# Altium PCB GPSDO_V1.0.PcbDoc (part 2 of 2)
Units mil, origin at the board's own origin, x right, y up, seen from the top; angles counter-clockwise.
Board outline 3740.16 x 3740.16 mil, 2 copper layers (Top Layer, Bottom Layer); 86 components, 49 nets, 384 pads, 118 vias.
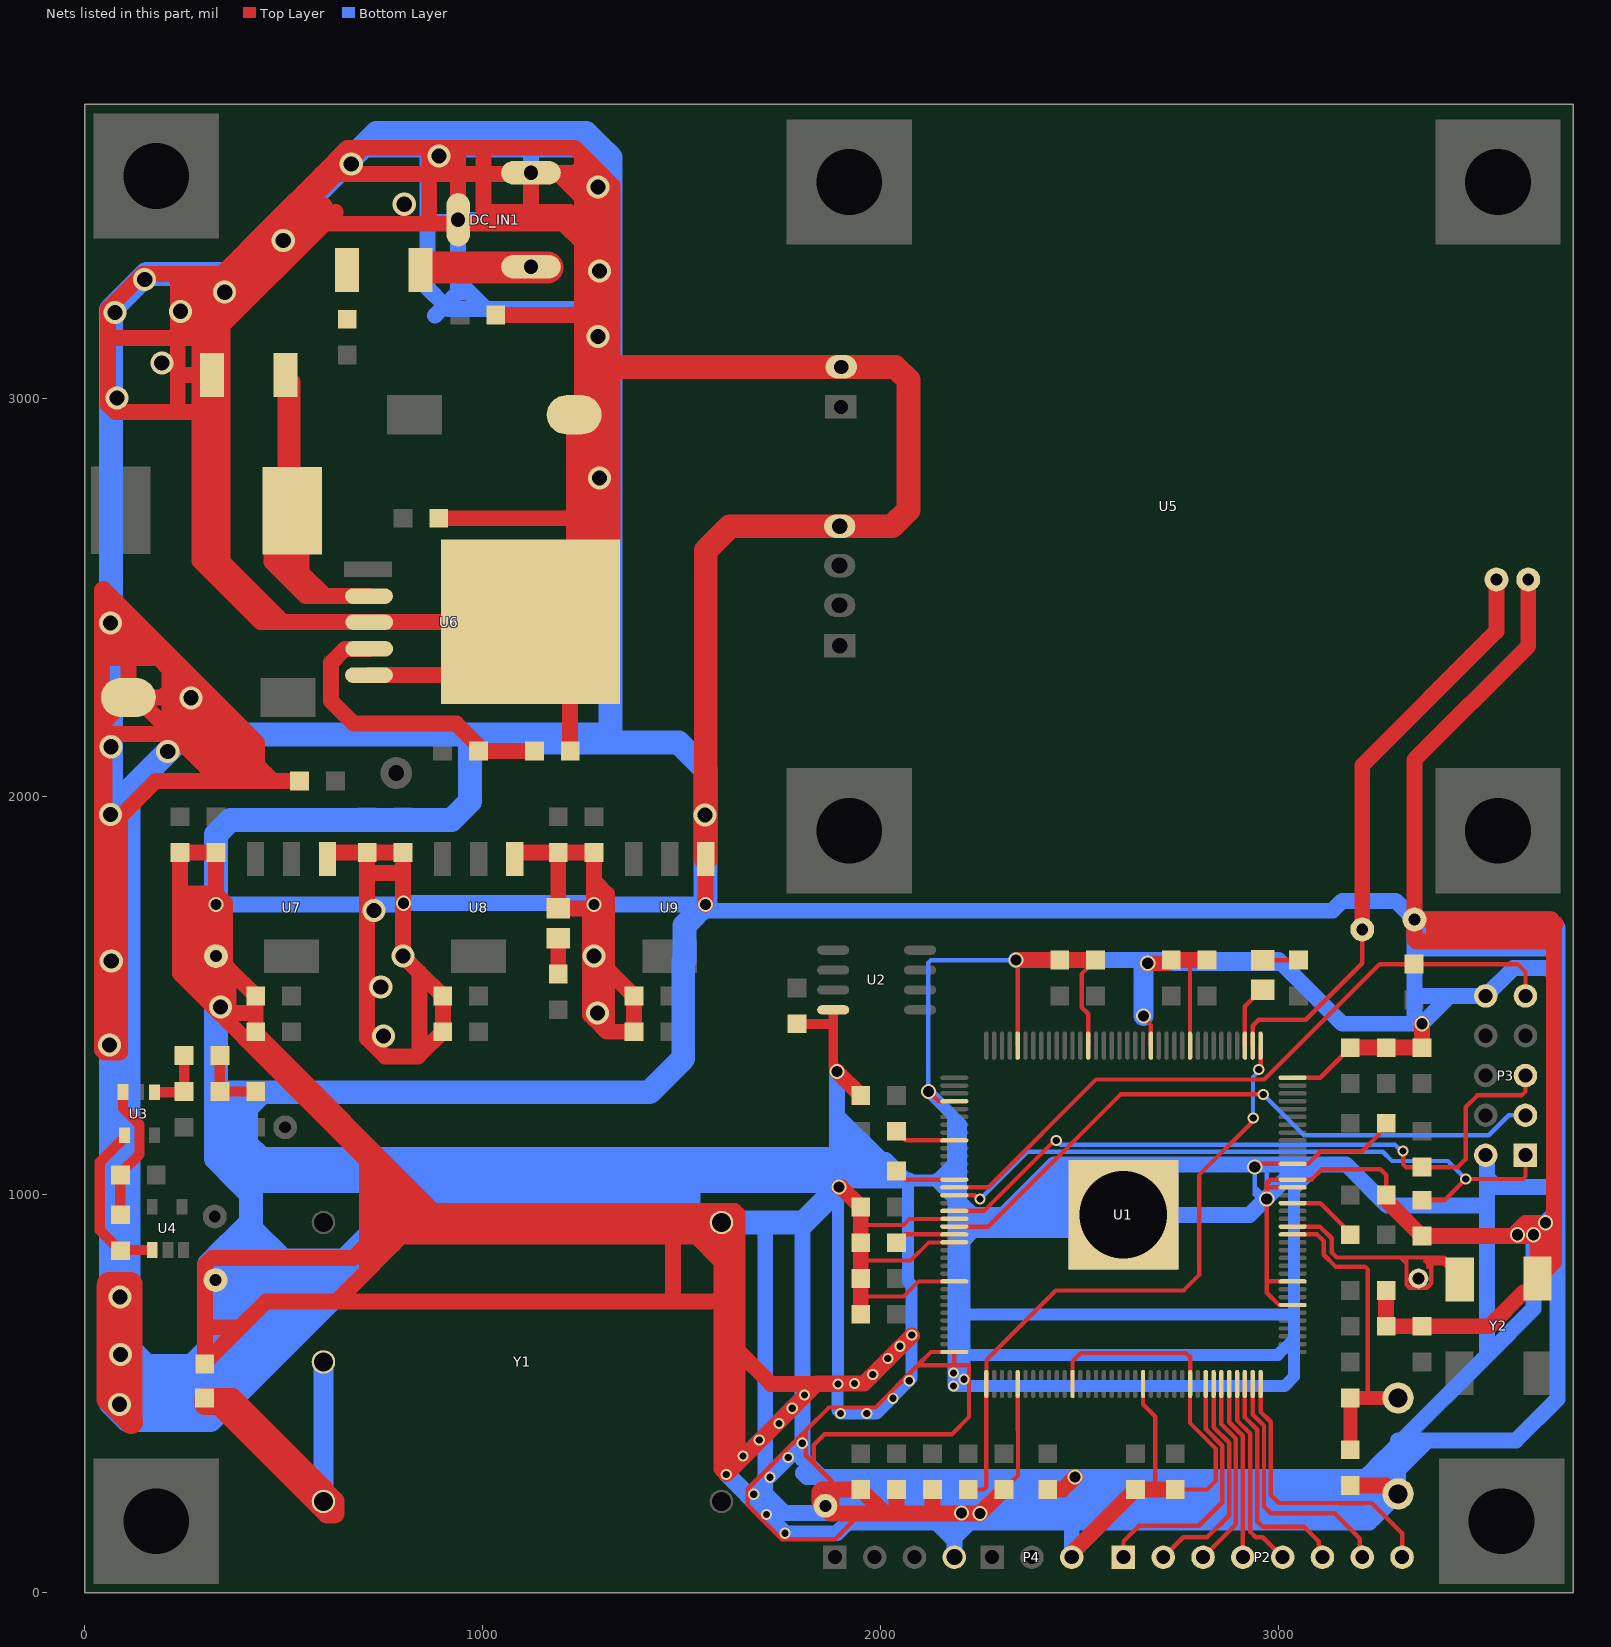
[diagram p2: the nets of this part, all layers, seen from the top]

## Via types
v1: diameter 28, hole 18, Top Layer to Bottom Layer, 41 vias
v2: diameter 58, hole 38, Top Layer to Bottom Layer, 38 vias
v3: diameter 38, hole 28, Top Layer to Bottom Layer, 38 vias
v4: diameter 38, hole 18, Top Layer to Bottom Layer, 1 vias

## Nets (pads, with @x,y where several pads share a name; then routed paths per layer and width w, separated by ;. In a path a pad name is that pad's centre, name@x,y a point inside that pad or via, vN(x,y) a via of type N, cw(c..) or ccw(c..) an arc to the next point about the centre after c; other vN are vias at no path point) (continued)
GND: C1.2 C2.1 C3.1 C4.1 C5.1 C6.1 C7.1 C8.1 C9.1 C10.1 C13.1 C14.1 C15.1 C16.1 C17.1 C18.1 C19.1 C20.1 C21.1 C22.1 C23.1 C24.1 C25.1 C26.1 C27.1 C28.1 C30.1 C31.2 C32.1 C33.2 C34.1 C37.1 C38.1 C39.1 C40.1 C41.1 C42.1 C43.1 C44.1 C45.1 C46.1 C47.1 C48.1 D2.1 DC_IN1.2 DC_IN1.3 LED3.2 P3.2 P3.10 P4.3 pad.0@329,786 pad.1 pad.2@330,1600 pad.2@1861,219 pad.2@2610,950 pad.2@3341,1692 pad.2@3627,2546 R4.2 R6.2 R16.2 S1.1 U1.4 U1.19 U1.22 U1.27 U1.36 U1.41 U1.48 U1.57 U1.63 U1.79 U1.82 U1.94 U1.95 U1.97 U1.108 U1.118 U1.123 U1.131 U1.140 U1.145 U2.4 U5.1 U5.3 U6.3 U6.5 U7.1 U8.1 U9.1 Y1.5 Y2.2 | length 115477.6
  Top Layer w10: 1950,745 2057.8,745 2095.47,782.67 U1.27@2185,782.67 ; 1950,835 2075,835 2121.09,881.09 U1.22@2185,881.09 ; 1950,925 2057.8,925 2072.95,940.15 U1.19@2185,940.15
  Top Layer w11: 1876,260 1876,282 1832,326 ; 1950,200 1885,135 1752,135 1666,221 1666,262 1812,408 ; v3(2120,1260) 2121.05,1260 2145.63,1235.42 U1.4@2185,1235.42 ; C15.1@2310,260 2345.12,295.12 2345.12,407.91 2344.25,408.78 U1.41@2344.25,525 ; U1.140@2344.25,1375 v3@2344.25,1590 ; U1.48@2482.05,525 2482.05,582.05 2503,603 2767,603 2777.72,592.28 2777.72,555.33 2777.32,554.93 U1.63@2777.32,525 2777.32,427.23 2841.5,363.05 2841.5,281.5 2820,260 C24.1@2740,260 ; U1.131@2521.42,1375 2521.42,1455.08 2504.88,1471.61 2504.88,1554.88 C20.1@2540,1590 ; U1.57@2659.21,525 2659.21,473.92 2690,443.13 2690,260 ; v3(2660,1450) 2660,1445.83 2678.9,1426.93 U1.123@2678.9,1375 ; C19.1@2722.07,1582.07 C19.1@2730,1590 ; 2775,1590 2777.32,1587.68 U1.118@2777.32,1375 ; v3(2940,1070) 2947.31,1070 2955.26,1077.95 U1.97@3035,1077.95 3073.92,1077.96 3105.96,1110 3210,1110 3251.88,1151.88 3251.88,1161.88 C26.1@3270,1180 ; U1.79@3035,723.62 3000.7,723.63 2970,754.33 2970,780 ; U1.82@3035,782.68 2972.68,782.68 2970,780 ; U1.94@3035,1018.9 2971.1,1018.9 2970,1020 ; U1.108@3035,1294.49 3104.49,1294.49 C6.1@3180,1370 ; C18.1@3270,1000 3270,1050 3255.54,1064.46 3108.5,1064.46 3082.63,1038.59 U1.95@3035,1038.58 2978.58,1038.58 2970,1030 2970,1020 ; 1812,408 1812,346 1832,326 ; 1812,408 1870,466 1987,466 2093,572 ; 1832,326 1832,372 1859,399 2179,399 2222,442 2222,572 2183,572 ; 2093,572 2183,572 ; 2093,572 2126.51,605.51 U1.36@2185,605.51 2185,574 2183,572 ; 2970,780 v3(2970,990) 2970,1020
  Top Layer w25: C3.1@1790,1430 1880.85,1430 ; U2.4@1880.85,1465 1880.85,1430 ; v3(1890,1310) 1890,1313.52 1880.85,1322.67 1880.85,1430
  Top Layer w40: C33.2@80,2276.99 106.99,2250 C33.2@110,2250 ; 89,1358 v2@50,1358 ; 89,1360 89,1950 179,2040 339.69,2040 ; C1.2@302,575 302,673 ; C1.2@308,584 391.5,667.5 ; v2@330,3261 330,3213 ; C32.1@540,2040 474,2040 ; 603,3486 557,3440 ; U7.1@610.55,1844.09 610.55,1858.35 612.2,1860 C41.1@710,1860 ; 631,3469 631,3468 603,3440 ; U6.5@714.51,2305.98 985.98,2305.98 U6.3@1118.98,2438.98 ; C34.1@890,2700 1230,2700 ; DC_IN1.3@938.5,3449.99 938.5,3564.5 ; C30.1@1033,3211 1250,3211 ; U8.1@1080.55,1864.76 1080.55,1861.65 1082.2,1860 C45.1@1190,1860 ; R16.2@1220,2115 1220,2340 U6.3@1121.02,2438.98 ; v3(1560,1730) 1560,1843.54 U9.1@1560.55,1844.09 ; v3(1890,1310) C21.1@1950,1250 ; v1(1893,525) 1839,525 ; v3(1895,1020) 1900,1020 C13.1@1950,970 1950,925 R6.2@1950,880 1950,835 C14.1@1950,790 1950,745 C22.1@1950,700 ; U5.3@1897.02,2680 U5.3@1900.67,2683.65 ; C8.1@2040,260 2040,200 ; v1@2079,647 1958,526 v1(1934,526) 1840,526 1839,525 ; C9.1@2130,260 2130,200 ; v3(2203.38,200.53) v3@2202.85,200 ; C15.1@2310,260 v3(2250,200) v3@2202.85,200 ; v3@2344.25,1590 C28.1@2450,1590 C20.1@2540,1590 ; C23.1@2420,260 2456.87,260 v3(2488.43,291.57) ; P4.3@2480,90 2483.65,93.65 2483.65,103.65 C16.1@2640,260 2690,260 C24.1@2740,260 ; v3(2671.09,1582.07) C19.1@2722.07,1582.07 ; C19.1@2730,1590 2775,1590 C27.1@2820,1590 ; C10.1@3180,270 3268.52,270 3289.52,249 S1.1@3300,249 ; C6.1@3180,1370 C5.1@3270,1370 C4.1@3360,1370 v3(3360,1430) ; C17.1@3270,760 C25.1@3270,670 C2.1@3360,670 3530,670 3614.88,754.88 3634.57,754.88 3650,770.32 Y2.2@3650,790 ; C18.1@3270,1000 3273.62,996.38 3273.62,983 R4.2@3360,896.62 v3@3587,896.62 ; 3411,1669 3421,1679 3692,1679 ; v3@3626.57,896.62 v3@3587,896.62 ; pad.2@3627,2546 3627,2379 3341,2093 pad.2@3341,1692 ; 3650,873.19 Y2.2@3650,790 ; 44,2158 44,1364 v2@50,1358 ; 44,2158 44,2184 ; 44,2158 50,2158 ; 44,2184 44,2349 ; 44,2184 50,2178 50,2158 ; 44,2184 C33.2@110,2250 ; 44,2349 110,2349 ; 44,2349 44,2385 ; 44,2385 106,2385 ; 44,2385 v2@44,2421 ; v2@44,2421 44,2490 ; v2@44,2421 102,2421 107.5,2426.5 ; 44,2490 107.5,2426.5 ; 44,2490 44,2520 47,2523 433,2137 433,2081 ; v2@50,1358 50,2158 ; 50,2158 193,2158 207.34,2172.34 ; 59,3148 59,3227 145.64,3313.64 234,3313.64 ; 59,3148 59,2985 77,2967 230,2967 ; 59,3148 64,3153 234,3153 ; 106,2385 141,2385 145,2389 ; 106,2385 110,2381 110,2349 ; 107.5,2426.5 145,2389 ; C33.2@110,2250 110,2349 ; C33.2@110,2250 C33.2@129.69,2250 ; 110,2349 185,2349 ; C33.2@129.69,2250 196,2250 213,2267 ; C33.2@129.69,2250 207.34,2172.34 ; 145,2389 185,2349 ; 185,2349 186,2349 213,2322 213,2321 ; 185,2349 213,2321 ; 207.34,2172.34 339.69,2040 ; 207.34,2172.34 213,2178 ; 213,2178 339.69,2051.31 339.69,2040 ; 213,2178 213,2222 ; 213,2222 213,2267 ; 213,2222 223,2222 405,2040 ; 213,2267 213,2321 ; 213,2267 221,2267 405,2083 ; 213,2321 405,2129 405,2083 ; 230,2967 288,2967 ; 230,2967 234,2971 234,3055 ; 234,3055 234,3153 ; 234,3055 239,3060 288,3060 ; 234,3153 260,3153 ; 234,3153 234,3313.64 ; 234,3313.64 252,3313.64 ; 240,1758 272,1758 ; 240,1758 C37.1@240,1860 C38.1@330,1860 330,1756 ; 240,1758 240,1556 v2@330,1466 ; 252,3313.64 252,3161 260,3153 ; 252,3313.64 342.64,3313.64 ; 252,3313.64 288,3277.64 288,3259 ; 260,3153 288,3153 ; 272,1758 306,1758 ; 272,1758 272,1553 v2@330,1495 ; 288,2593 288,2967 ; 288,2593 317.98,2593 ; 288,2593 442.02,2438.98 472,2438.98 ; 288,2967 288,3060 ; 288,2967 307,2967 320,2954 ; 288,3060 288,3153 ; 288,3060 D2.1@312,3060 ; 288,3153 288,3259 ; 288,3153 312,3153 ; 288,3259 312,3283 ; 302,673 302,824 320,842 676,842 710,876 ; 302,673 307.5,667.5 391.5,667.5 ; 306,1758 306,1552 330,1528 ; 306,1758 328,1758 330,1756 ; D2.1@312,3060 312,3153 ; D2.1@312,3060 312,3053 D2.1@319.41,3060 ; D2.1@312,3060 D2.1@319.41,3060 ; 312,3153 312,3244 ; 312,3153 330,3153 ; 312,3244 344.1,3275.94 382,3313.64 ; 312,3244 312,3283 ; 312,3283 342.64,3313.64 ; 317.98,2593 345,2593 ; 317.98,2593 472,2438.98 ; D2.1@319.41,3060 319.72,3060.29 330,3070 330,3153 ; D2.1@319.41,3060 D2.1@320,3060 320,2954 ; 320,2954 320,2618 345,2593 ; v2@330,1466 v2@330,1495 ; v2@330,1466 361.5,1434.5 ; v2@330,1495 330,1528 ; 330,1528 pad.2@330,1600 ; pad.2@330,1600 353,1577 ; pad.2@330,1600 v3(330,1730) 330,1756 ; 330,1756 353,1733 353,1577 ; 330,3153 330,3167 ; 330,3167 346,3183 ; 330,3167 330,3213 ; 330,3213 346,3229 ; 339.69,2040 405,2040 ; 342.64,3313.64 469,3440 ; 342.64,3313.64 382,3313.64 ; 345,2593 346,2592 ; 346,2592 346,3183 ; 346,2592 499.02,2438.98 ; 346,3183 603,3440 ; 346,3183 346,3229 ; 346,3229 557,3440 ; 353,1577 361.5,1568.5 ; 361.5,1434.5 433.62,1362.38 ; 361.5,1434.5 v2@361.5,1470 ; v2@361.5,1470 361.5,1568.5 ; v2@361.5,1470 374.5,1457 430,1457 ; 361.5,1568.5 C40.1@430,1500 430,1457 ; 382,3313.64 482.97,3414.11 509,3440 ; 391.5,667.5 455.81,731.81 631.81,731.81 ; 405,2040 405,2083 ; 405,2040 433,2040 ; C39.1@430,1410 430,1457 ; C39.1@430,1410 430,1407 C39.1@433.62,1403.38 ; C39.1@430,1410 433.62,1406.38 C39.1@433.62,1403.38 ; 433,2040 474,2040 ; 433,2040 433,2081 ; 433,2081 474,2040 ; 433.62,1362.38 C39.1@433.62,1403.38 ; 433.62,1362.38 710,1086 ; C39.1@433.62,1403.38 877.5,959.5 ; 469,3440 509,3440 ; 469,3440 594,3565 ; 472,2438.98 499.02,2438.98 ; 499.02,2438.98 U6.3@715.01,2438.98 U6.3@1118.98,2438.98 ; 509,3440 557,3440 ; 509,3440 634,3565 ; 557,3440 603,3440 ; 594,3565 634,3565 ; 594,3565 660,3631 700,3631 ; 603,3440 864,3440 ; 631.81,731.81 1480,731.81 ; 631.81,731.81 710,810 ; 634,3565 866,3565 ; 634,3565 700,3631 ; 700,3631 866,3631 ; 710,810 746.5,846.5 ; 710,810 710,876 ; 710,876 710,940 ; 710,940 710,1086 ; 710,940 719.21,930.79 739.5,930.79 ; 710,1086 739.5,1056.5 ; 710,1809 C41.1@710,1860 ; 710,1809 710,1393 755,1348 838,1348 841.5,1351.5 ; 710,1809 799,1809 800,1810 ; C41.1@710,1860 C42.1@800,1860 800,1810 ; 739.5,930.79 772,930.79 ; 739.5,930.79 739.5,1056.5 ; 739.5,930.79 739.5,853.5 746.5,846.5 ; 739.5,1056.5 772,1024 ; 746.5,846.5 774.5,874.5 ; 772,877 777,877 ; 772,877 772,930.79 ; 772,877 774.5,874.5 ; 772,930.79 772,991 ; 772,930.79 830.79,930.79 ; 772,991 772,1024 ; 772,991 830.79,932.21 830.79,930.79 ; 772,1024 865.21,930.79 ; 774.5,874.5 777,877 ; 777,877 796,896 ; 796,896 1478,896 ; 796,896 830.79,930.79 ; 800,1810 v2(800,1600) 841.5,1558.5 ; 830.79,930.79 865.21,930.79 ; 841.5,1351.5 C43.1@900,1410 C44.1@900,1500 841.5,1558.5 ; 841.5,1351.5 841.5,1558.5 ; 864,3440 1008,3440 ; 864,3440 866,3442 866,3565 ; 865.21,930.79 906.21,930.79 ; 866,3565 v2@866,3596 ; 866,3565 938,3565 ; v2@866,3596 866,3631 ; v2@866,3596 938.5,3596 ; 866,3631 941,3631 ; 877.5,959.5 1632.5,959.5 1640,952 1640,909 ; 877.5,959.5 906.21,930.79 ; 906.21,930.79 1478,930.79 ; 938,3565 938.5,3565 ; 938,3565 938.5,3564.5 ; 938.5,3564.5 938.5,3565 ; 938.5,3565 1002,3565 ; 938.5,3565 938.5,3596 ; 938.5,3596 938.5,3628.5 941,3631 ; 941,3631 1002,3631 ; 1002,3469 1120,3469 ; 1002,3469 1002,3565 ; 1002,3469 1002,3446 1008,3440 ; 1002,3565 DC_IN1.2@1121.54,3565 ; 1002,3565 1002,3631 ; 1002,3631 1231,3631 1250,3612 ; 1008,3440 1203,3440 ; U6.3@1118.98,2438.98 U6.3@1121.02,2438.98 ; U6.3@1120,2440 U6.3@1230,2550 ; U6.3@1120,2440 U6.3@1121.02,2438.98 ; U6.3@1120,2440 1138.31,2440 1139.33,2438.98 U6.3@1121.02,2438.98 ; 1120,3469 1218,3469 1247,3440 ; 1120,3469 1121.54,3470.54 DC_IN1.2@1121.54,3565 ; DC_IN1.2@1121.54,3565 1190,3565 1250,3505 ; DC_IN1.2@1121.54,3565 DC_IN1.2@1121.54,3568.09 1234.09,3568.09 1250,3584 ; C45.1@1190,1860 C46.1@1280,1860 1280,1788 ; C45.1@1190,1860 LED3.2@1190,1720 v3@1270,1720 ; 1203,3440 1247,3440 ; 1203,3440 1250,3393 ; U6.3@1230,2550 U6.3@1250,2570 ; U6.3@1230,2550 1230,2700 ; 1230,2700 C31.2@1230,2960 C31.2@1250,2980 ; 1247,3440 1250,3437 ; U6.3@1250,2570 C31.2@1250,2980 ; U6.3@1250,2570 U6.3@1289,2609 ; C31.2@1250,2980 1250,3090 ; 1250,3090 1250,3211 ; 1250,3090 1259.61,3080.39 1289,3080.39 ; 1250,3211 1250,3393 ; 1250,3393 1250,3437 ; 1250,3437 1250,3505 ; 1250,3505 1250,3584 ; 1250,3584 1250,3612 ; 1250,3612 1289,3573 ; v3@1270,1720 1270,1452 v2@1280,1442 ; v3@1270,1720 v3(1280,1730) ; v2@1280,1442 1312,1410 ; v2@1280,1442 v2(1280,1600) ; v2(1280,1600) 1312,1568 ; v2(1280,1600) v3(1280,1730) ; v3(1280,1730) 1280,1788 ; 1280,1788 1312,1756 1312,1568 ; U6.3@1289,2609 1289,3080.39 ; U6.3@1289,2609 1326,2646 1326,3080.39 ; 1289,3080.39 1289,3573 ; 1289,3080.39 1326,3080.39 ; 1289,3573 1326,3536 1326,3080.39 ; 1312,1410 1312,1568 ; 1312,1410 C47.1@1380,1410 C48.1@1380,1500 1312,1568 ; 1478,896 1536,896 ; 1478,896 1478,930.79 ; 1478,896 1478,733.81 1480,731.81 ; 1478,930.79 Y1.5@1600,930.79 1600,896 ; 1480,731.81 1600,731.81 ; 1536,896 1600,896 ; 1536,896 1600,832 ; 1600,731.81 1600,832 ; 1600,731.81 1600,312 1613,299 1640,326 ; 1600,731.81 1634.19,731.81 1640,726 ; 1600,832 1600,896 ; 1600,896 1627,896 1640,909 ; 1640,326 v1(1778,464) 1839,525 ; 1640,326 1640,610 ; 1640,610 1640,726 ; 1640,610 1725,525 1839,525 ; 1640,726 1640,909 ; pad.2@1874,200 1846,228 1846,254 1852,260 1876,260 ; pad.2@1874,200 1950,200 2010,200 ; pad.2@1874,200 1876,202 1876,260 ; 1876,260 C7.1@1950,260 2010,200 ; 2010,200 2040,200 ; 2040,200 2130,200 ; 2130,200 v3@2202.85,200 ; pad.2@3341,1692 3390,1692 ; pad.2@3341,1692 3341,1642 3346,1637 3397,1637 ; 3390,1644 3390,1692 ; 3390,1644 3657,1644 3692,1679 ; 3390,1644 3397,1637 ; 3390,1692 3685,1692 3695,1682 3692,1679 ; 3397,1637 3692,1637 ; v3@3587,896.62 3620.38,930 v3(3670,930) Y2.2@3670,810 ; Y2.2@3650,790 Y2.2@3670,810 ; Y2.2@3670,810 3692,832 3692,1637 ; 3692,1637 3692,1679
  Top Layer w60: 62,771 60,769 60,487 115,432 ; v2(89,743.3) 89,749 61,777 114,777 115,776 115,432 ; 117,430 115,432 ; 1326,3080.39 U5.1@1900.98,3080.39 2036.61,3080.39 2070,3047 2070,2721 2029,2680 U5.3@1897.02,2680 1621,2680 1560.55,2619.55 U9.1@1560.55,1844.09
  Bottom Layer w11: v3(2120,1260) 2120,1583.56 2126.44,1590 v3(2340,1590) ; pad.1@2610,950 pad.1@2650,990 ; v3@2660,1570.97 v3(2671.09,1582.07) ; v3(2940,1070) 2940,1020 ; 2948,1000 v3@2960,1000 ; 2977,1076.8 2970,1069.8 2970,993 v3(2970,990) ; 2940,1001 2949.5,1010.5 ; 2940,1001 2951,990 2967,990 v3(2970,990) ; 2940,1001 2940,1020 ; 2940,1020 2949.5,1010.5 ; 2949.5,1010.5 v3@2960,1000 ; v3@2960,1000 2968.5,991.5 v3(2970,990)
  Bottom Layer w30: 1890,1061 1983,1061 2028,1061 2041,1061 2066,1036 2069,1033 2069,783.02 2078,774.02 v1(2078,648) ; v1@1892,525 1892,458 v1(1899,451) v1(1965,451) 1990,451 v1(2072,533) 2078,539 v1(2078,648) ; v3(1895,1020) 1893,1018 v1(1893,525) 1955,525 v1(2078,648) ; 1953,1091 1955,1093 1996,1093 2014,1093 2071,1036 2144,1036 2144,1041 2182,1079 ; v3(2120,1260) 2182,1198 ; 2230,950 2211,931 ; 2256,950 2237,931 ; 2278,950 2259,931 ; pad.1@2610,950 pad.1@2591,931 ; 3107,1076.8 3102.8,1076.8 3039,1013 3039,706 ; 2182,1079 2182,1198 ; 2182,1079 2182,998 2183.5,996.5 ; 2182,1198 2201.5,1178.5 2201.5,978.5 2183.5,996.5 ; 2183,958 2183,996 2183.5,996.5 ; 2183,958 v1(2183,553) v1(2183,520) 2211,520 ; 2183,958 2210,931 2211,931 ; 2211,520 2211,598 ; 2211,520 3015,520 3039,544 3039,639 ; 2211,598 2211,700 ; 2211,598 2998,598 3039,639 ; 2211,700 2211,883 ; 2211,700 3033,700 3039,706 ; 2211,883 2235,907 ; 2211,883 2211,905 ; 2211,905 2237,931 ; 2211,905 2211,931 ; 2211,931 2237,931 ; 2235,907 2259,931 ; 2235,907 2567,907 pad.1@2591,931 ; 2237,931 2259,931 ; 2259,931 pad.1@2591,931 ; 3039,639 3039,706
  Bottom Layer w40: v3(330,1730) 798.42,1730 v3(801.34,1732.92) 1277.08,1732.92 v3(1280,1730) v3(1560,1730) ; 861,3668 861,3636.5 861,3444 ; 880,3209 905.5,3234.5 ; 941,3668 938.5,3665.5 938.5,3636.5 DC_IN1.3@938.5,3449.99 ; 985.5,3248.5 966.5,3267.5 ; 1017,3226 1285,3226 ; 1123,3668 1121.54,3666.54 1121.54,3636.5 DC_IN1.2@1121.54,3568.09 1121.54,3450.45 1122,3449.99 ; 1217,3668 1248.5,3636.5 1285,3600 1285,3449.99 ; 1321,3226 1285,3226 ; 1321,3452 1318.99,3449.99 1285,3449.99 ; 1532.5,1702.5 1544,1714 3135,1714 3160,1739 3294,1739 pad.2@3341,1692 ; Y1.5@1600,930.79 1612,918.79 v1(1612,298) ; v1@1614,301 v1@1614.5,300.5 ; 1710,920.79 1710,396 ; 1805,301 1814.43,291.57 1849.43,291.57 ; 1805.79,930.79 1804,929 v1@1804,490 ; v3(1890,1310) 1890,1199 ; 2028,1061 1996,1093 1890,1199 ; 2071,1036 2066,1036 1911,1036 v3(1895,1020) 1890,1025 1890,1061 1890,1091 ; 2144,1036 2182,998 ; pad.1@2185,90 2185,132.03 ; 2201.5,978.5 2230,950 2256,950 2278,950 2309,950 ; v3(2340,1590) v3@2663.16,1590 ; 2461,1027 2430.5,996.5 ; 2471,996 2465,996 2464.5,996.5 2430.5,996.5 ; P4.3@2480,90 2480,177.03 ; pad.1@2650,990 pad.2@2736.8,1076.8 ; 3201.5,275.5 3197,271 ; P3.2@3520,1100 3523.65,1096.35 3523.65,1043.43 ; 861,3444 861,3279 905.5,3234.5 ; 861,3444 932.51,3444 DC_IN1.3@938.5,3449.99 ; 905.5,3234.5 938.5,3267.5 ; 905.5,3234.5 914,3226 1008,3226 966.5,3267.5 ; 938.5,3267.5 966.5,3267.5 ; 938.5,3267.5 938.5,3295.5 ; 938.5,3295.5 966.5,3267.5 ; 938.5,3295.5 DC_IN1.3@938.5,3449.99 ; DC_IN1.3@938.5,3449.99 1122,3449.99 ; 1122,3449.99 1285,3449.99 ; 1285,3226 1285,3449.99 ; v1(1612,298) v1(1713,197) v1(1760,150) 1889.95,150 1916.97,177.03 ; v1(1612,298) v1@1614.5,300.5 ; v1@1614.5,300.5 1710,396 ; v1@1614.5,300.5 1667,248 v1(1681,248) 1681,254 1710,283 ; 1710,283 v1(1803,376) v1@1804,377 ; 1710,283 1710,396 ; 1710,283 1710,250 1759.47,200.53 1940.47,200.53 ; 1710,396 v1(1778,464) v1@1804,490 ; v1@1804,377 1804,337 1849.43,291.57 ; v1@1804,377 v1@1804,490 ; 1849.43,291.57 1880,261 ; 1849.43,291.57 v3(2488.43,291.57) ; 1880,261 1920.5,220.5 ; 1880,261 2460.57,261 2480,241.57 ; 1890,1091 1890,1148 ; 1890,1091 1953,1091 1896,1148 1890,1148 ; 1890,1148 1890,1199 ; 1916.97,177.03 2140,177.03 ; 1916.97,177.03 1940.47,200.53 ; 1920.5,220.5 2480,220.5 ; 1920.5,220.5 1940.47,200.53 ; 1940.47,200.53 v3(2203.38,200.53) 2479.47,200.53 ; 2140,177.03 2187,177.03 ; 2140,177.03 2185,132.03 ; 2185,132.03 2185,138.03 ; 2185,138.03 2185,175.03 2187,177.03 ; 2185,138.03 2224,177.03 ; 2187,177.03 2224,177.03 ; 2224,177.03 2480,177.03 ; 2309,950 2435.8,1076.8 2460,1076.8 ; 2309,950 2351,950 ; 2351,950 pad.2@2477,950 ; 2351,950 2364.5,963.5 ; 2351,950 2351,967.8 2460,1076.8 ; 2364.5,963.5 2460,1059 2460,1076.8 ; 2364.5,963.5 2397.5,963.5 2430.5,996.5 ; 2430.5,996.5 pad.2@2477,950 ; 2460,1076.8 pad.2@2736.8,1076.8 ; pad.2@2477,950 pad.1@2610,950 2927,950 2967,990 2968.5,991.5 2970,993 3053.8,1076.8 ; 2479.47,200.53 2480,200.53 ; 2479.47,200.53 2480,200 ; 2480,177.03 2480,200 ; 2480,177.03 3228.02,177.03 ; 2480,200 2480,200.53 ; 2480,200.53 2480,220.5 ; 2480,200.53 3204.52,200.53 3228.02,177.03 ; 2480,220.5 3146.5,220.5 ; 2480,220.5 2480,241.57 ; 2480,241.57 2480,271 ; 2480,241.57 2487.43,249 3175,249 ; 2480,271 2480,283.13 v3(2488.43,291.57) ; 2480,271 3197,271 ; v3(2488.43,291.57) 3217.57,291.57 ; v3@2663.16,1590 3000,1590 3007.93,1582.07 ; v3@2663.16,1590 v3(2671.09,1582.07) 3007.93,1582.07 ; pad.2@2736.8,1076.8 2977,1076.8 3053.8,1076.8 ; 3007.93,1582.07 3160,1430 v3(3360,1430) ; 3053.8,1076.8 3102.8,1076.8 3169.2,1076.8 3273,973 3523.65,973 ; 3146.5,220.5 3240,220.5 ; 3146.5,220.5 3175,249 ; 3175,249 3197,271 ; 3175,249 3240,249 ; 3197,271 3217.57,291.57 ; 3217.57,291.57 3240,314 ; 3217.57,291.57 3240,291.57 ; 3228.02,177.03 3240,189 ; 3240,189 3271.5,220.5 ; 3240,189 3240,220.5 ; 3240,220.5 3271.5,220.5 ; 3240,220.5 3240,249 ; 3240,249 3300,309 ; 3240,249 S1.1@3300,249 ; 3240,249 3240,253 ; 3240,253 3298,311 ; 3240,253 3240,291.57 ; 3240,291.57 3240,314 ; 3240,291.57 3248.07,291.57 3271,314.5 ; 3240,314 3240.5,314.5 ; 3240.5,314.5 3271,314.5 ; 3240.5,314.5 3300,374 ; 3271,314.5 3294.5,314.5 3298,311 ; 3271.5,220.5 S1.1@3300,249 ; 3298,311 3300,313 ; 3298,311 3300,309 ; S1.1@3300,249 3300,309 ; 3300,309 3300,313 ; 3300,309 3374,383 ; 3300,313 3300,349 ; 3300,349 3300,374 ; 3300,349 3305,349 3339,383 ; 3300,374 3300,383 3309,383 ; 3300,374 3309,383 ; 3309,383 3339,383 ; 3309,383 3523.65,597.65 ; 3339,383 3374,383 ; 3341,1497 3341,1619 ; 3341,1497 3341,1449 v3(3360,1430) ; 3341,1497 3344,1500 3430,1500 ; 3341,1619 3341,1651 ; 3341,1619 3698,1619 3700,1621 ; 3341,1651 3699,1651 3700,1650 ; 3341,1651 pad.2@3341,1692 ; pad.2@3341,1692 3361,1672 3700,1672 ; pad.2@3341,1692 3680,1692 3700,1672 ; v3(3360,1430) 3430,1500 ; 3374,383 3596,383 3700,487 3700,960 ; 3430,1500 P3.10@3520,1500 3590,1570 3676.57,1570 3700,1546.57 ; 3523.65,597.65 3523.65,973 ; 3523.65,597.65 3640,714 v3(3640,900) v3(3670,930) 3700,960 ; 3523.65,973 3523.65,1043.43 ; 3523.65,1043.43 3547.08,1020 3700,1020 ; 3700,960 3700,1020 ; 3700,1020 3700,1546.57 ; 3700,1546.57 3700,1621 ; 3700,1621 3700,1650 ; 3700,1650 3700,1672
  Bottom Layer w50: v3(2660,1450) v3@2660,1570.97
  Bottom Layer w60: 1498,984 1495,981 748.79,981 ; 1532.5,1702.5 1507,1677 1507,1589 1504,1586 1504,1343 1419,1258 445,1258 ; 1544,1714 v3(1560,1730) 1560,2069 1492,2137 968,2137 ; v3@1890,1025 1880,1035 1518,1035 ; 1890,1091 443,1091 ; v3@1893,1018 1805.79,930.79 Y1.5@1600,930.79 1516,930.79 ; 1953,1091 1983,1061 ; v2@66,476 66,531 ; v2@66,476 108,434 316,434 358,476 ; v2@66,476 358,476 ; 66,531 66,570 ; 66,531 347,531 ; 66,570 v2(66,2126) 66,3224 156,3314 379,3314 701.5,3636.5 ; 66,570 156,570 ; 156,570 270,570 ; 156,570 109,617 109,798 111,800 111,2016 v2(209,2114) 252,2157 948,2157 ; 270,570 352,570 ; 270,570 314,614 314,827 352,865 ; 330,1091 384,1091 ; 330,1091 386,1035 ; 330,1091 330,1228 ; 330,1228 pad.2@330,1600 v3(330,1730) 330,1906 366,1942 922,1942 968,1988 968,2137 ; 330,1228 360,1258 ; 347,531 395,531 404,522 ; 347,531 352,536 352,570 ; 352,570 352,865 ; 352,570 388,570 ; 352,865 380.5,893.5 ; 358,476 404,522 ; 360,1258 406,1258 ; 360,1258 360,1115 384,1091 ; 380.5,735 380.5,786 ; 380.5,735 380.5,577.5 388,570 ; 380.5,735 418,735 ; 380.5,786 380.5,893.5 ; 380.5,786 418,786 ; 380.5,893.5 418,931 ; 384,1091 443,1091 ; 386,1035 738,1035 ; 386,1035 418,1003 418,931 ; 388,570 418,600 ; 388,570 452,570 ; 404,522 452,570 ; 406,1219 406,1258 ; 406,1219 445,1258 ; 406,1219 406,1128 443,1091 ; 406,1258 445,1258 ; 418,600 512.5,694.5 ; 418,600 418,696 ; 418,696 418,735 ; 418,696 511,696 512.5,694.5 ; 418,735 418,786 ; 418,735 553,735 ; 418,786 418,819 ; 418,786 604,786 ; 418,819 418,915 ; 418,819 435,836 497,836 ; 418,915 418,931 ; 418,915 497,836 ; 452,570 812.79,930.79 ; 497,836 654,836 ; 512.5,694.5 553,735 ; 553,735 604,786 ; 604,786 654,836 ; 654,836 748.79,930.79 ; 701.5,3636.5 733,3668 861,3668 941,3668 1123,3668 1217,3668 1260,3668 1291.5,3636.5 ; 701.5,3636.5 861,3636.5 938.5,3636.5 1121.54,3636.5 1248.5,3636.5 1291.5,3636.5 ; 738,1035 1518,1035 ; 738,1035 748.79,1024.21 748.79,981 ; 748.79,930.79 748.79,981 ; 748.79,930.79 812.79,930.79 ; 812.79,930.79 1516,930.79 ; 948,2157 1321,2157 1321,3226 1321,3452 1321,3607 1291.5,3636.5 ; 948,2157 968,2137 ; 1516,930.79 1518,932.79 1518,1035
  other v1: 1722,290.57 1768,340 1654,344 1695,384 1745,426 2031,489 1809,497 2209,537 1980,549 2018,589 2049,620
  other v2: 88,474 90,599 63,1377 751,1399 1289,1457 341,1472 744,1522 67,1588 727,1715 1559,1955 65,1956 267,2249 65,2437 1294,2801 81,3002 194,3090 1290,3157 76,3217 241,3220 352,3268 151,3300 1294,3321 499,3398 803,3489 1290,3532 670,3590 890,3610
  other v3: 3600,900
GPS_1PPS_Pin100: pad.2@3210,1667 U1.110 U5.7 | length 1493.7
  Top Layer w11: U1.110@2934.8,1375 2934.8,1424.8 2950,1440 3067.93,1440 3210,1582.07 pad.2@3210,1667
  Top Layer w40: pad.2@3210,1667 3210,2079 3547.02,2416.02 U5.7@3547.02,2546
JTAG_TCK: P3.1 R4.1 U1.16 | length 1704.4
  Top Layer w11: U1.16@2185,999.2 2236.2,999.2 2245.4,990 v1(2250,990) ; R4.1@3360,986.62 3416.62,986.62 v1(3470,1040) 3613.56,1040 3620,1046.44 P3.1@3620,1100
  Bottom Layer w11: v1(2250,990) 2368.3,1108.3 3261.7,1108.3 3284.8,1085.2 3322.81,1085.2 3424.8,1085.2 v1(3470,1040)
JTAG_TDI: P3.9 R3.2 U1.15 | length 1735.7
  Top Layer w11: U1.15@2185,1018.89 2270.1,1018.89 2541.21,1290 2963.8,1290 3253.8,1580 R3.2@3340,1580 3600,1580 3620,1560 P3.9@3620,1500
JTAG_TDO: P3.3 U1.20 | length 1635.8
  Top Layer w11: U1.20@2185,920.46 2270.46,920.46 2602.61,1252.61 v1(2961.04,1252.61)
  Bottom Layer w11: v1(2961.04,1252.61) 3063.66,1150 3528.02,1150 3578.02,1200 P3.3@3620,1200
JTAG_TMS: P3.5 R2.2 U1.18 | length 1754.8
  Top Layer w11: U1.18@2185,959.84 2259.84,959.84 2437,1137 v1(2441,1137) ; v1(3312.25,1110.7) 3312.63,1110.33 3312.63,1077.25 3319.88,1070 R2.2@3360,1070 3449.97,1070 3469.97,1090 3469.97,1220.72 3499.28,1250.03 3610.03,1250.03 3620,1260 P3.5@3620,1300
  Bottom Layer w11: v1@2441,1141 v1(2441,1137) 2451.7,1126.3 3292.06,1126.3 3307.65,1110.7 v1(3312.25,1110.7)
NetC11_2: C11.2 R7.1 R8.2 | length 180
  Top Layer w26: R8.2@340,1350 C11.2@340,1260 R7.1@430,1260
NetC12_2: C12.2 R8.1 U3.1 | length 165.5
  Top Layer w26: U3.1@175.2,1258.39 248.39,1258.39 C12.2@250,1260 R8.1@250,1350
NetD1_1: D1.1 DC_IN1.1 | length 309.6
  Top Layer w40: DC_IN1.1@1119.69,3330 DC_IN1.1@1121.54,3331.85
  Top Layer w80: D1.1@856,3330 1119.69,3330 DC_IN1.1@1163,3330
NetD1_2: D1.2 L4.2
NetD2_2: D2.2 L5.1 U6.2 | length 1695.8
  Top Layer w40: L5.1@470,2640 470,2590 555.52,2504.48 565.52,2504.48 ; U6.2@714.09,2504.9 U6.2@714.51,2504.48 605.52,2504.48 ; L5.1@505,2625 D2.2@505,3060 522,3043 L5.1@522,2719 ; L5.1@505,2625 505,2565 565.52,2504.48 ; L5.1@505,2625 L5.1@522,2642 ; L5.1@522,2642 L5.1@522,2719 ; L5.1@522,2642 522,2588 545,2565 ; L5.1@522,2719 545,2696 545,2565 ; 545,2565 605.52,2504.48 ; 565.52,2504.48 605.52,2504.48
NetL1_2: L1.2 Y1.2 Y1.3 | length 1317.7
  Top Layer w50: 590,269 628,231 628,200 609,200 337,472 301,472 L1.2@301,490 371,490 600,261 Y1.3@600,230
  Bottom Layer w50: Y1.3@600,230 Y1.2@600,580.39
NetL2_2: L2.2 U1.37 U1.109 | length 1630.5
  Top Layer w11: L2.2@2220,260 2259.07,260 2265.51,266.44 2265.51,554.93 2266.02,555.44 2266.02,586.02 2440,760 2761,760 2800,799 2800,1050 2936,1186 v1(2936,1193) ; v1(2950,1315.5) 2950,1320.1 2954.48,1324.58 U1.109@2954.49,1375
  Bottom Layer w11: v1(2936,1193) 2936,1197.79 2935.54,1198.24 2935.54,1296.44 2950,1310.9 v1(2950,1315.5)
NetLED2_1: LED2.1 R1.2 | length 96.8
  Top Layer w11: LED2.1@2964.8,1585.2 LED2.1@2960,1590 R1.2@3050,1590
NetLED2_2: LED2.2 U1.111 | length 161.1
  Top Layer w11: U1.111@2915.12,1375 2915.12,1474.25 2956.06,1515.2 LED2.2@2960,1515.2
NetLED3_1: LED3.1 R17.2 | length 80
  Top Layer w40: R17.2@1190,1555.2 LED3.1@1190,1635.2
NetR6_1: R6.1 U1.21 | length 153.6
  Top Layer w11: R6.1@2040,880 2060.78,900.78 U1.21@2185,900.78
NetR9_1: R9.1 U1.92 | length 192.1
  Top Layer w11: U1.92@3035,979.53 3104.47,979.53 3183.7,900.3 R9.1@3183.7,889.7
NetR10_1: R10.1 U1.14 | length 153.9
  Top Layer w11: R10.1@2040,1060 2061.43,1038.57 U1.14@2185,1038.57
NetR11_1: R11.1 U1.9 | length 154.5
  Top Layer w11: R11.1@2040,1160 2063.01,1136.99 U1.9@2185,1136.99
NetR12_1: R12.1 R13.2 U3.3 | length 345.5
  Top Layer w26: R13.2@90,950 R12.1@90,1050 90,1054.62 138,1102.62 138,1176 96.46,1217.54 U3.3@96.46,1258.43
NetR13_1: R13.1 U3.4 U4.1 | length 417.6
  Top Layer w26: U3.4@100,1150 99.22,1149.22 99.22,1143.32 38.38,1082.47 38.38,911.62 R13.1@90,860 91.58,861.58 U4.1@170,861.58
NetR14_2: R14.2 R16.1 U6.4 | length 769.1
  Top Layer w40: U6.4@715.01,2371.98 714.59,2371.56 653.89,2371.56 619.51,2337.18 619.51,2240.49 676,2184 934.22,2184 1003.22,2115 R16.1@1130,2115
NRST: C10.2 R5.2 S1.2 U1.88 | length 817.4
  Top Layer w11: U1.88@3035,900.79 3096.21,900.79 3113,884 3113,850 3143,820 3216.5,820 3224.12,812.38 3224.12,490.67
  Top Layer w35: C10.2@3180,360 R5.2@3180,490 S1.2@3300,490
Pin65: P2.1 U1.65 | length 643.3
  Top Layer w11: P2.1@2610,90 2610,130 2648.73,168.73 2799.11,168.73 2858.5,228.12 2858.5,370.09 2816.69,411.9 U1.65@2816.69,525
Pin66: P2.2 U1.66 | length 554.9
  Top Layer w11: P2.2@2710,90 2760.03,140.03 2820,140.03 2875.5,195.53 2875.5,377.5 2836.38,416.62 U1.66@2836.38,525
Pin67: P2.3 U1.67 | length 484.3
  Top Layer w11: P2.3@2810,90 2892.5,172.5 2892.5,387.5 2856.06,423.94 U1.67@2856.06,525
Pin68: P2.4 U1.68 | length 449.2
  Top Layer w11: U1.68@2875.75,525 2875.75,429.21 2910,394.96 P2.4@2910,90
Pin69: P2.5 U1.69 | length 492.8
  Top Layer w11: U1.69@2895.43,525 2895.43,433.57 2929,400 2929,153.33 2942.33,140 2960,140 P2.5@3010,90
Pin70: P2.6 U1.70 | length 576.6
  Top Layer w11: U1.70@2915.12,525 2915.12,440.88 2946,410 2946,180 2960,166 3064,166 3100.81,129.19 3100.81,99.19 P2.6@3110,90
Pin71: P2.7 U1.71 | length 642.7
  Top Layer w11: U1.71@2934.8,525 2934.8,448.2 2963,420 2963,217 2980,200 3140,200 3203.97,136.03 3203.97,96.03 P2.7@3210,90
Pin72: P2.8 U1.72 | length 719.4
  Top Layer w11: U1.72@2954.49,525 2954.49,455.51 2980,430 2980,246 3000,226 3150.65,226 3150.77,225.88 3212.11,225.88 3212.24,226 3234,226 3310,150 P2.8@3310,90
SYSTEM_50MHz: pad.0@3351,790 U1.89 Y2.3 | length 916.7
  Top Layer w11: U1.89@3035,920.47 3103.56,920.47 3110,914.03 ; 3110.04,914.07 3133,891.11 3133,855.53 3145.78,842.74 3306.26,842.74 ; 3376,820 3376,820.83 3383,827.83 ; 3306.26,842.74 3321,842.74 ; 3306.26,842.74 3321,828 ; 3321,828 3321,842.74 ; 3321,828 3321,775 3329,767 3372,767 3383,778 3383,827.83 ; 3321,842.74 3380,842.74 ; 3380,842.74 3397.91,842.74 ; 3380,842.74 3383,839.74 3383,835 ; 3383,827.83 3383.67,828.5 ; 3383,827.83 3383,828.5 ; 3383,828.5 3383.67,828.5 ; 3383,828.5 3374.5,828.5 3368,835 3383,835 ; 3383,828.5 3383,835 ; 3383,835 3390.17,835 ; 3383.67,828.5 3414.5,828.5 ; 3383.67,828.5 3390.17,835 ; 3390.17,835 3397.91,842.74 ; 3390.17,835 3408,835 3414.5,828.5 ; 3397.91,842.74 3415.82,842.74 3455,803.56 Y2.3@3455,788 3414.5,828.5
pads on no net: P3.6 P3.7 P3.8 U1.1 U1.2 U1.3 U1.7 U1.10 U1.11 U1.23 U1.24 U1.25 U1.28 U1.30 U1.31 U1.32 U1.33 U1.38 U1.39 U1.44 U1.46 U1.49 U1.50 U1.51 U1.54 U1.55 U1.58 U1.59 U1.60 U1.64 U1.73 U1.74 U1.75 U1.76 U1.77 U1.80 U1.83 U1.84 U1.85 U1.86 U1.87 U1.90 U1.91 U1.98 U1.99 U1.100 U1.101 U1.103 U1.104 U1.105 U1.106 U1.112 U1.113 U1.114 U1.115 U1.119 U1.120 U1.121 U1.124 U1.125 U1.126 U1.127 U1.128 U1.129 U1.132 U1.133 U1.135 U1.136 U1.137 U1.138 U1.141 U1.142 U1.143 U5. U5.4 U5.5 Y2.1

## Keep-outs
Keep-Out Layer:
  the board outline again, w10

## Other copper
Top Layer:
  rectangle net NetD1_2: 630,3200 690,3380
  region net GND: 145.64,3313.64 229,3313.64 229,2976 234,2971 230,2967 77,2967 59,2985 70,2996 70,3247 113,3290
  region net SYSTEM_50MHz: 3321,842.74 3380,842.74 3383,839.74 3383,778 3372,767 3329,767 3321,775
  region net GND: 749,889 1446,889 1451,894 1462,883 1478,883 1478,733.81 1474.81,737 660,737
  region net GND: 710,1809 799,1809 800,1808 800,1590 841.5,1548.5 841.5,1351.5 758.5,1351.5 755,1348 720,1383 720,1790 710,1800
  region net GND: 1640,610 1717,533 1818,533 1828,523 1649,344 1640,344
  region net GND: 1818,410 1814,410 1666,262 1666,221 1755,132 1882,132 1882,136 1938,192 1930,200 1874,200 1874,280 1876,282 1829,329
  region net GND: 2100,579 2215,579 2222,572 2222,442 2179,399 1859,399 1829,369 1829,329 1812,346 1812,408 1870,466 1987,466
  region net GND: 320,842 696,842 705,851 707,849 707,807 631.81,731.81 628.62,735 459,735 391.5,667.5 388,671 304,671 304,820 291,833
  region net GND: 50,2158 52,2156 223.69,2156 339.69,2040 337.69,2038 160,2038 46,1924
  region net GND: 866,3631 866,3442 864,3440 509,3440 509,3466 670,3627
Bottom Layer:
  rectangle net GND: 1619,496 1800,866
  region net GND: 2207,920 2237,950 2370,950 2370,1008 2441,1079 3042,1079 3042,696 3040,694 2197,694
  region net GND: 2211,598 2998,598 3039,639 3039,544 3015,520 2203,520 2195,512
  region net GND: 1897.02,1030 1903.02,1036 2066,1036 2066,551 2078,539 1990,451 1899,451 1895,455 1895,1020
  region net GND: 3529,1023 3684,1023 3701,1006 3701,494 3588,381 3307,381 3523.65,597.65
  region net GND: 1616,515 1801,515 1804,512 1804,337 1940.47,200.53 1896.95,157 1752,157 1747,152 1614,285 1614,301
  region net GND: 971,2127 981,2137 1505,2137 1505,2112 1571,2046 1571,1724 1505,1658 1505,1334 1495,1334 1402,1241 327,1241 327,1903 350,1926 350,1941 897,1941 928,1972 952,1972 952,1991 968,2007 962,2013 962,2147
  region net GND: 692,3629 699.5,3636.5 861,3636.5 861,3291 914,3238 914,3226 1308,3226 1311,3229 1311,2158 265,2158 112,2005 69,2005 69,3206 163,3300 163,3314 379,3314

## Silkscreen, mask and mechanical layers (free items; w line width, h text height)
Top Overlay:
  text "5V" at 758,2102 h30
  text "GPS-1PPS" at 3051,1705 h30
  text "GND" at 3303,1627 h30
  text "GND" at 182,1581 h40
  text "GPSDO-V1.0" at 968,1170 h60
  text "PWM" at 554,1152 h40
  text "VC" at 295,867 h40
  text "50M" at 3315,727 h30
  text "GND" at 277,701 h40
  text "RESET" at 3391,372 h40
  text "GND" at 1824,256 h30
  text "Pin34" at 1892,189 h20
  text "Pin42" at 1969,189 h20
  text "Pin53" at 2371,189 h20
  text "Pin52" at 2276,188 h20
  text "Pin43" at 2073,187 h20
  text "1PPS" at 1937,150 h30
  text "RXD" at 2360,150 h30
  text "GND" at 2460,150.22 h30
  text "10M" at 1839,149 h30
  text "1M" at 2070,149 h30
  text "TXD" at 2256,148 h30
  text "P68" at 2885,148 h30
  text "P70" at 3075,148 h30
  text "P72" at 3271,148 h30
  text "P65" at 2571,147 h30
  text "P69" at 2981,147 h30
  text "P71" at 3166,147 h30
  text "P66" at 2678,146 h30
  text "P67" at 2784,146 h30
  text "GND" at 2148,14 h30

## Text inside footprints (layer, text, board x,y; h text height)
C31: Top Overlay "+" at 762,3050 h20 r270
C33: Top Overlay "+" at 578,2160 h20 r90
U6: Top Overlay "5" at 930.51,2322.98 h20 r270; Top Overlay "1" at 930.51,2582.98 h20 r270